# Altium PCB DST800_NMEA2k-CAN_Indicator.PcbDoc
Units mil, origin at the board's own origin, x right, y up, seen from the top; angles counter-clockwise.
Board outline 1775 x 2200 mil, 2 copper layers (Top Layer, Bottom Layer), stack 62.8 mil thick; 29 components, 28 nets, 162 pads, 35 vias.
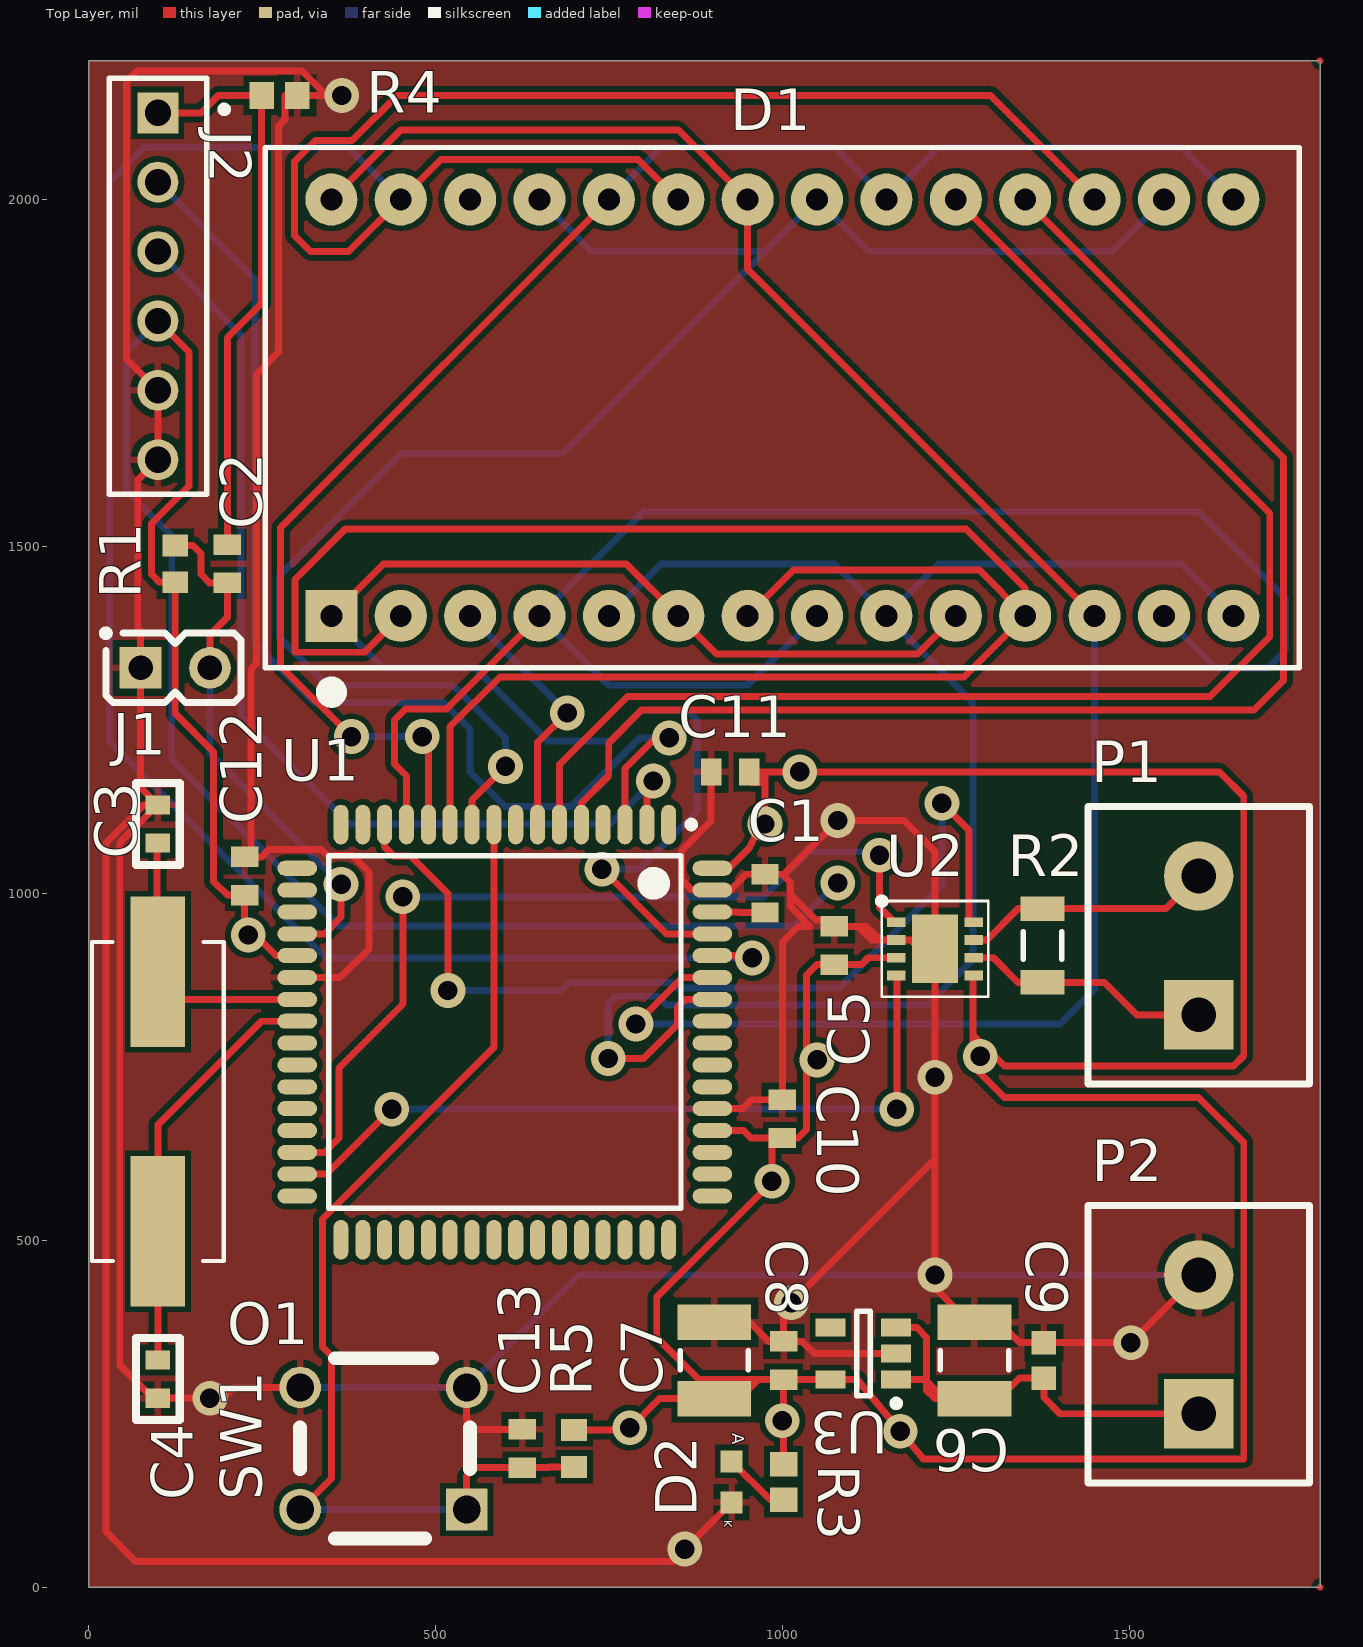
[diagram p0: Top Layer view]
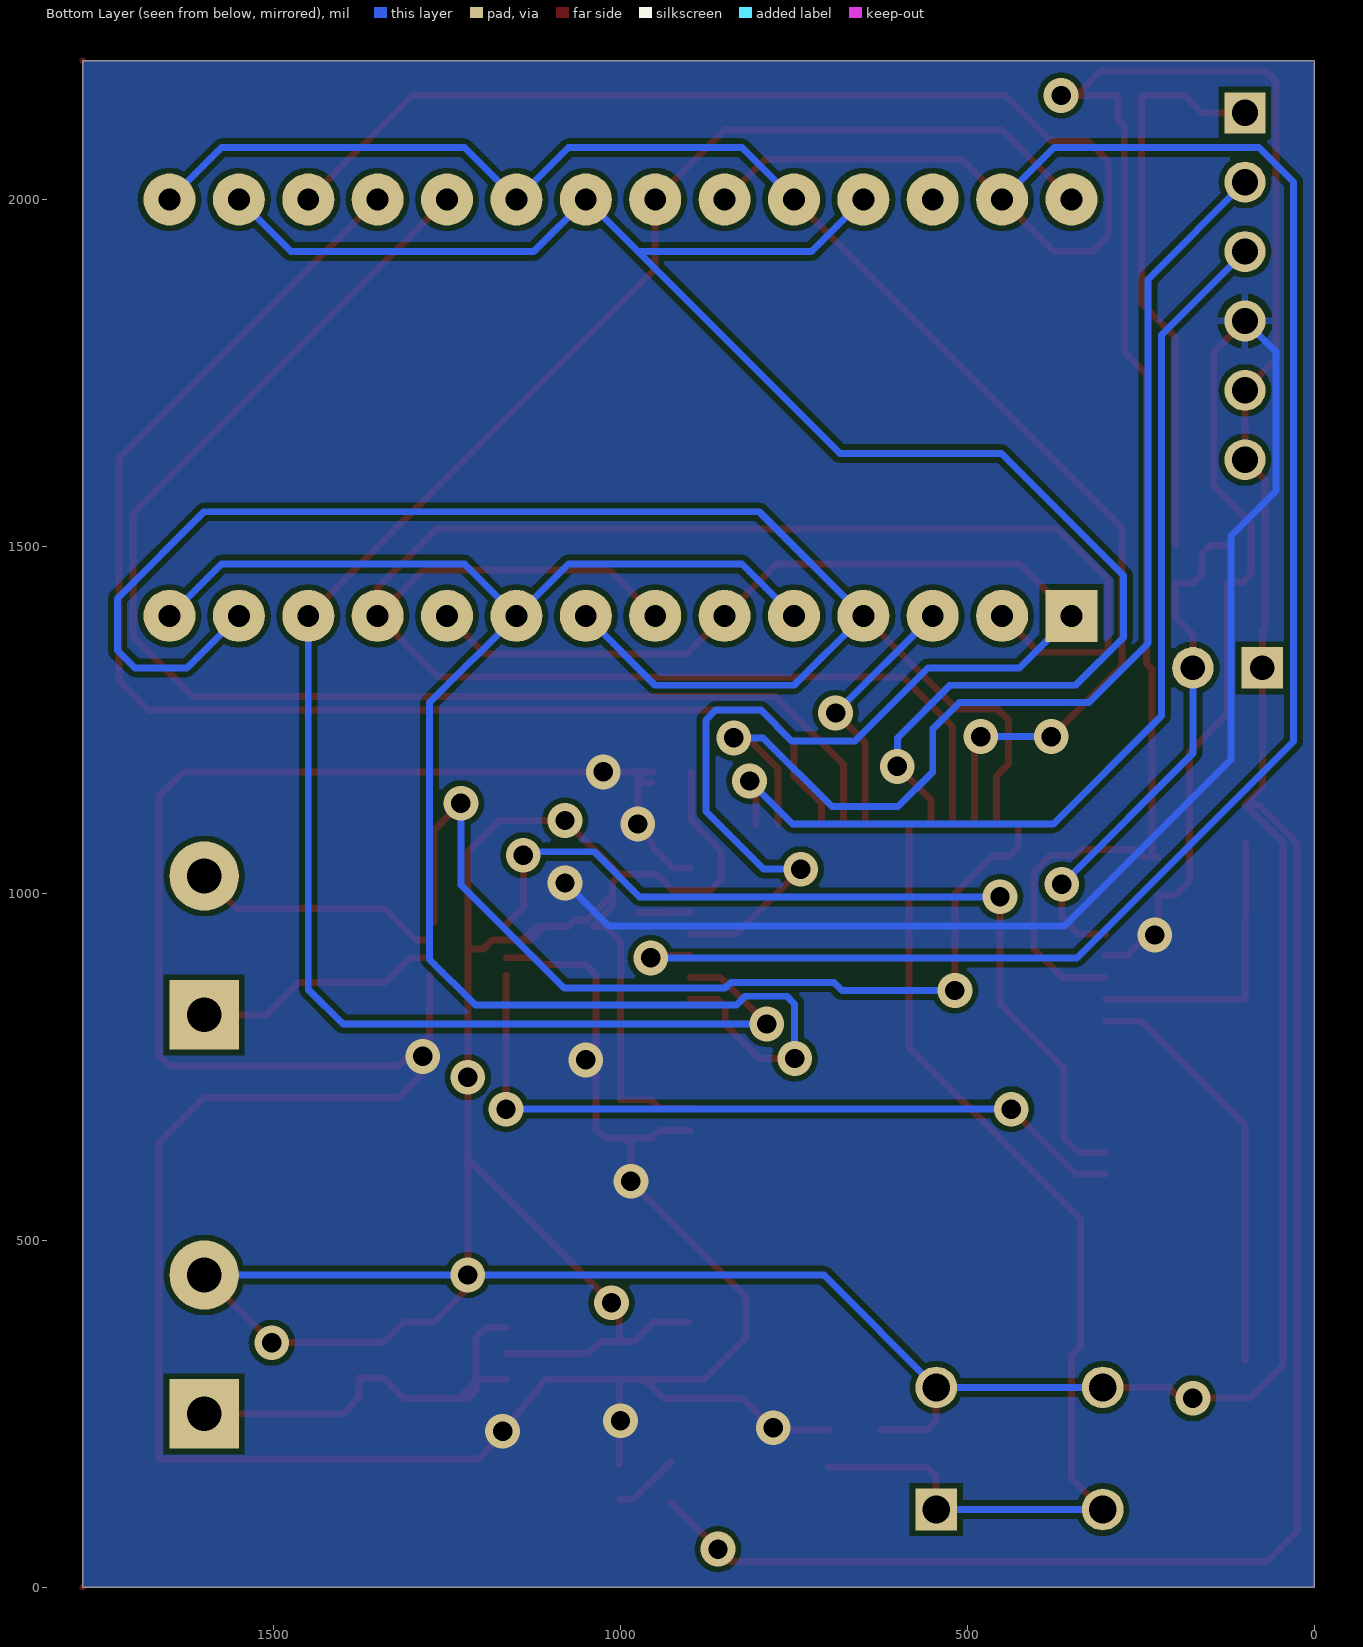
[diagram p1: Bottom Layer view, seen from below]

## Layer stack, top to bottom
Top Solder: solder mask 1, Solder Resist, Dk 3.5
Top Layer: signal copper 1.4
Dielectric 1: core 60, FR-4, Dk 4.6
Bottom Layer: signal copper 1.4
Bottom Solder: solder mask 1, Solder Resist, Dk 3.5

## Board outline
0,0 1775,0 1775,2200 0,2200

## Design rules (kind name [scope] priority, off if disabled: settings)
AssemblyTestPointUsage AssemblyTestPointUsage_1 [All] p2:
AssemblyTestpoint AssemblyTestpoint_1 [All] p2: testpointundercomponent=TRUE minsize=40 maxsize=100 preferedsize=60 minholesize=0 maxholesize=40 preferedholesize=32 testpointgrid=1 usegrid=TRUE gridtolerance=0.01 allowsidetop=TRUE allowsidebottom=TRUE
Clearance [All] p1: gap=8 ignorepadtopadclearanceinfootprint=FALSE
ComponentClearance ComponentClearance_1 [All] p2: gap=10 collisioncheckmode=3 verticalgap=10 showdistances=FALSE
DiffPairsRouting DiffPairsRouting_1 [All] p2: maxlimit=10 minlimit=10 mostfreqgap=10 toplayer_minwidth=15 toplayer_maxwidth=15 toplayer_prefwidth=15 bottomlayer_minwidth=15 bottomlayer_maxwidth=15 bottomlayer_prefwidth=15 maxuncoupledlength=500
FabricationTestPointUsage FabricationTestPointUsage_1 [All] p2: valid=0 allowmultiple=FALSE
FabricationTestpoint FabricationTestpoint_1 [All] p2: side=3 testpointundercomponent=TRUE minsize=40 maxsize=100 preferedsize=60 minholesize=0 maxholesize=40 preferedholesize=32 testpointgrid=1 allowsidetop=TRUE allowsidebottom=TRUE usegrid=TRUE gridtolerance=0.01
FanoutControl Fanout_LCC [IsLCC] p1: bgadir=Out bgaviamode=Centered fanoutstyle=Auto fanoutdirection=Alternating viagrid=1 // Fanout_LCC (Default Rule)
FanoutControl Fanout_BGA [IsBGA] p2: bgadir=Out bgaviamode=Centered fanoutstyle=Auto fanoutdirection=Alternating viagrid=1 // Fanout_BGA (Default Rule)
FanoutControl Fanout_Default [All] p4: bgadir=Out bgaviamode=Centered fanoutstyle=Auto fanoutdirection=Alternating viagrid=1 // Fanout_Default (Default Rule)
FanoutControl Fanout_Small [(CompPinCount < 5)] p5: bgadir=Out bgaviamode=Centered fanoutstyle=Auto fanoutdirection=OutThenIn viagrid=1 // Fanout_Small (Default Rule)
FanoutControl Fanout_BGA_1 [IsBGA] p6: bgadir=Out bgaviamode=Centered fanoutstyle=Auto fanoutdirection=Alternating viagrid=1 // Fanout_BGA (Default Rule)
FanoutControl Fanout_LCC_1 [IsLCC] p7: bgadir=Out bgaviamode=Centered fanoutstyle=Auto fanoutdirection=Alternating viagrid=1 // Fanout_LCC (Default Rule)
FanoutControl Fanout_SOIC_1 [IsSOIC] p8: bgadir=Out bgaviamode=Centered fanoutstyle=Auto fanoutdirection=Alternating viagrid=1 // Fanout_SOIC (Default Rule)
FanoutControl Fanout_Small_1 [(CompPinCount < 5)] p9: bgadir=Out bgaviamode=Centered fanoutstyle=Auto fanoutdirection=OutThenIn viagrid=1 // Fanout_Small (Default Rule)
FanoutControl Fanout_Default_1 [All] p10: bgadir=Out bgaviamode=Centered fanoutstyle=Auto fanoutdirection=Alternating viagrid=1 // Fanout_Default (Default Rule)
Height Height_1 [All] p2: minheight=0 maxheight=1000 prefheight=500
HoleSize HoleSize_1 [All] p2: absolutevalues=TRUE maxlimit=100 minlimit=1 maxpercent=80.000 minpercent=20.000
HoleToHoleClearance HoleToHoleClearance_1 [All] p2: gap=10 allowstackedmicrovias=TRUE
LayerPairs LayerPairs_1 [All] p2: enforce=TRUE
MinimumSolderMaskSliver [All] p1: minsoldermaskwidth=0
NetAntennae NetAntennae_1 [All] p2: netantennaetolerance=0
PasteMaskExpansion PasteMaskExpansion_1 [All] p2: expansion=0
PlaneClearance PlaneClearance_1 [All] p2: clearance=10
PlaneConnect [All] p1: pad.planeconnectstyle=Relief pad.reliefexpansion=20 pad.reliefentries=4 pad.reliefconductorwidth=10 pad.reliefairgap=10 via.planeconnectstyle=Direct via.reliefexpansion=20 via.reliefentries=4 via.reliefconductorwidth=10 via.reliefairgap=10
PlaneConnect PlaneConnect_1 [All] p2: planeconnectstyle=Direct reliefexpansion=20 reliefentries=4 reliefconductorwidth=10 reliefairgap=10
PolygonConnect [All] p1: thpad.connectstyle=Relief thpad.reliefconductorwidth=10 thpad.reliefentries=4 thpad.polygonreliefangle="90 Angle" thpad.airgapwidth=10 smdpad.connectstyle=Relief smdpad.reliefconductorwidth=10 smdpad.reliefentries=4 smdpad.polygonreliefangle="90 Angle" smdpad.airgapwidth=10 via.connectstyle=Direct via.reliefconductorwidth=10 via.reliefentries=4 via.polygonreliefangle="90 Angle" via.airgapwidth=10
PolygonConnect PolygonConnect_2 [All] p2: connectstyle=Relief reliefconductorwidth=10 reliefentries=4 polygonreliefangle="90 Angle" airgapwidth=10
PolygonConnect PolygonConnect_1 [IsVia] p3: connectstyle=Direct reliefconductorwidth=10 reliefentries=4 polygonreliefangle="90 Angle" airgapwidth=10
RoomDefinition DST800_NMEA2k-CAN_Indicator [InComponentClass('DST800_NMEA2k-CAN_Indicator')] p1: confinementstyle=ConfineIn formatcopy=TRUE lockcomponents=FALSE outline 0,0 1775,0 1775,2195 0,2195
RoutingCorners RoutingCorners_1 [All] p2: cornerstyle=45-Degree minsetback=100 maxsetback=100
RoutingLayers RoutingLayers_1 [All] p2: top layer_v5=TRUE bottom layer_v5=TRUE
RoutingPriority RoutingPriority_1 [All] p2: routingpriority=0
RoutingTopology RoutingTopology_1 [All] p2: topology=Shortest
RoutingVias [All] p1: holewidth=28 width=50 viastyle="Through Hole" minholewidth=28 minwidth=50 maxholewidth=28 maxwidth=50
RoutingVias RoutingVias_1 [All] p2: holewidth=28 width=50 viastyle="Through Hole" minholewidth=28 minwidth=50 maxholewidth=28 maxwidth=50
ShortCircuit ShortCircuit_1 [All] p2: allowed=FALSE
SilkToBoardRegionClearance SilkToBoardRegionClearance_1 [All] p2:
SilkToSilkClearance [All] p1: silktosilkclearance=0
SilkToSolderMaskClearance [IsPad] p1: minsilkscreentomaskgap=0 clearancetoexposedcopper=TRUE
SolderMaskExpansion [All] p1: expansion=4
SolderMaskExpansion SolderMaskExpansion_1 [All] p2: expansion=4
UnRoutedNet UnRoutedNet_1 [All] p2:
UnpouredPolygon UnpouredPolygon_1 [All] p2:
Width [All] p1: maxlimit=10 minlimit=10 preferedwidth=10
Width Width_1 [All] p2: maxlimit=100 minlimit=10 preferedwidth=10
22 further rules are at their usual default settings.

## Components (designator, comment, footprint, x,y, rotation, side; value= is the part's Value field where it differs from the comment)
C1 "CL10B104KB8NNNC" PCB-MHHQFTC5ILNRG4QI8DS6-1 975,1000 r270 top value=0.1µF
C2 "CL10B104KB8NNNC" PCB-MHHQFTC5ILNRG4QI8DS6-1 200,1475 r270 top value=0.1µF
C3 "C1608C0G1H150J080AA" PCB-69EC8BFNJHYEBNPBRRFX-1 100,1100 r270 top value=15.0pF
C4 "C1608C0G1H150J080AA" PCB-69EC8BFNJHYEBNPBRRFX-1 100,300 r90 top value=15.0pF
C5 "CL10B104KB8NNNC" PCB-MHHQFTC5ILNRG4QI8DS6-1 1075,925 r270 top value=0.1µF
C6 "C3225X7R1E106K250AC" PCB-J0JK5XR8QBNASKONCCG4-1 1276.84,326.84 r270 top value=10.0µF
C7 "C3225X7R1E106K250AC" PCB-J0JK5XR8QBNASKONCCG4-1 901.84,326.84 r270 top value=10.0µF
C8 "CL10B104KB8NNNC" PCB-MHHQFTC5ILNRG4QI8DS6-1 1001.84,326.84 r270 top value=0.1µF
C9 "06031C102MAT2A" CAPC1608X90X35LL15T15 1376.84,326.84 r270 top value=1000pF
C10 "CL10B104KB8NNNC" PCB-MHHQFTC5ILNRG4QI8DS6-1 1000,675 r270 top value=0.1µF
C11 "CL10B104KB8NNNC" PCB-MHHQFTC5ILNRG4QI8DS6-1 925,1175 r0 top value=0.1µF
C12 "CL10B104KB8NNNC" PCB-MHHQFTC5ILNRG4QI8DS6-1 225,1025 r270 top value=0.1µF
C13 "CL10B104KB8NNNC" PCB-MHHQFTC5ILNRG4QI8DS6-1 625,200 r270 top value=0.1µF
D1 "LDT-A514RI" LDTA514RI 1000,1700 r0 top
D2 "LTST-C190KGKT" PCB-EAPFWHP0RNKSGUJF96H3-1 926.84,151.84 r270 top
J1 "5-146281-2" PCB-ANGFY19QUC8NC8NC7D0M-1 75,1325 r0 top
J2 "961106-6404-AR" PCB-660833-1 100,1875 r270 top
O1 "9C-16.000MAAJ-T" PCB-3QVZOJCYIDN2GLTQQMBL-1 100,700 r90 top
P1 "282834-2" PCB-0KDX5SNEYUDSMU18L6ZV-1 1600,825 r90 top
P2 "282834-2" PCB-0KDX5SNEYUDSMU18L6ZV-1 1600,250 r90 top
R1 "CRG0603F10K" RESC1608X55X30NL15T15 125,1475 r270 top value=10kO
R2 "CRCW1206120RJNEA" RESC3216X60X45LL10T20 1375,925 r270 top value=120O
R3 "ERA-3YEB102V" RESC1608X55X30NL20T20 1001.84,151.84 r90 top value=1kO
R4 "DNP" RESC1608X55X30NL20T20 275,2150 r180 top value=1kO
R5 "CRG0603F10K" RESC1608X55X30NL15T15 700,200 r90 top value=10kO
SW1 "FSM102" PCB-8PS4WLA3PJ92CXV2YUVU-1 425,200 r180 top
U1 "AT90CAN32-16AU" 64A_L 600,800 r270 top
U2 "ATA6561-GBQW" PCBComponent_1 1220,920 r0 top
U3 "MIC5205-5.0YM5-TR" SOT-23-5_N 1116.84,336.84 r180 top

## Footprints (in the part's own frame and the unit in brackets; to place one, negate y for a bottom-side part, rotate by r counter-clockwise, add the part's x,y. Pads: shape width x height; smd on the part's side, far side on the other; paste and mask are expansions set on the pad)
64A_L [mm] "Thin QFP, 64-Leads, Body 14x14mm, Pitch 0.8mm, IPC High Density"
  oval 1.45x0.55 smd: 1(-7.6,6) 2(-7.6,5.2) 3(-7.6,4.4) 4(-7.6,3.6) 5(-7.6,2.8) 6(-7.6,2) 7(-7.6,1.2) 8(-7.6,0.4) 9(-7.6,-0.4) 10(-7.6,-1.2) 11(-7.6,-2) 12(-7.6,-2.8) 13(-7.6,-3.6) 14(-7.6,-4.4) 15(-7.6,-5.2) 16(-7.6,-6) 33(7.6,-6) 34(7.6,-5.2) 35(7.6,-4.4) 36(7.6,-3.6) 37(7.6,-2.8) 38(7.6,-2) 39(7.6,-1.2) 40(7.6,-0.4) 41(7.6,0.4) 42(7.6,1.2) 43(7.6,2) 44(7.6,2.8) 45(7.6,3.6) 46(7.6,4.4) 47(7.6,5.2) 48(7.6,6)
  oval 0.55x1.45 smd: 17(-6,-7.6) 18(-5.2,-7.6) 19(-4.4,-7.6) 20(-3.6,-7.6) 21(-2.8,-7.6) 22(-2,-7.6) 23(-1.2,-7.6) 24(-0.4,-7.6) 25(0.4,-7.6) 26(1.2,-7.6) 27(2,-7.6) 28(2.8,-7.6) 29(3.6,-7.6) 30(4.4,-7.6) 31(5.2,-7.6) 32(6,-7.6) 49(6,7.6) 50(5.2,7.6) 51(4.4,7.6) 52(3.6,7.6) 53(2.8,7.6) 54(2,7.6) 55(1.2,7.6) 56(0.4,7.6) 57(-0.4,7.6) 58(-1.2,7.6) 59(-2,7.6) 60(-2.8,7.6) 61(-3.6,7.6) 62(-4.4,7.6) 63(-5.2,7.6) 64(-6,7.6)
  silkscreen extent -7.72,-6.45 6.45,6.95, body extent -7,-7 7,7, height 1.6
CAPC1608X90X35LL15T15 [mm] "CAPC1608X90X35LL15T15"
  rect 0.85x0.9 smd: 1(-0.65,0) 2(0.65,0)
  body extent -0.88,-0.48 0.87,0.48, height 0.9
LDTA514RI [mm] "Lumex 2 digit 7 segment display"
  rect 1.905x1.905 hole 0.8: 1(-16.51,-7.62)
  round 1.905 hole 0.8: 2(-13.97,-7.62) 3(-11.43,-7.62) 4(-8.89,-7.62) 5(-6.35,-7.62) 6(-3.81,-7.62) 7(-1.27,-7.62) 8(1.27,-7.62) 9(3.81,-7.62) 10(6.35,-7.62) 11(8.89,-7.62) 12(11.43,-7.62) 13(13.97,-7.62) 14(16.51,-7.62) 15(16.51,7.62) 16(13.97,7.62) 17(11.43,7.62) 18(8.89,7.62) 19(6.35,7.62) 20(3.81,7.62) 21(1.27,7.62) 22(-1.27,7.62) 23(-3.81,7.62) 24(-6.35,7.62) 25(-8.89,7.62) 26(-11.43,7.62) 27(-13.97,7.62) 28(-16.51,7.62)
  silkscreen extent -18.92,-10.67 18.92,9.53, body extent -18.9,-9.5 18.9,9.5, height 12
PCB-0KDX5SNEYUDSMU18L6ZV-1 [mil]
  rect 100x100 hole 50: 1(0,0)
  round 100 hole 50: 2(200,0)
  silkscreen extent -100,-160 300,159, body extent -121,-159 301,160, height 394
PCB-3QVZOJCYIDN2GLTQQMBL-1 [mm]
  rect 5.5x2 smd: 1(-4.75,0) 2(4.75,0)
  silkscreen extent -5.84,-2.41 5.84,2.41, body extent -6.95,-2.5 6.95,2.5, height 4.5
PCB-8PS4WLA3PJ92CXV2YUVU-1 [mil]
  rect 60x60 hole 40: 1(-120,88)
  round 60 hole 40: 2(120,88) 3(-120,-88) 4(120,-88)
  silkscreen extent -125,-130 120,130, body extent -154,-118 154,118, height 235
PCB-69EC8BFNJHYEBNPBRRFX-1 [mm]
  rect 0.7x0.9 smd: 1(-0.7,0) 2(0.7,0)
  silkscreen extent -1.5,-0.8 1.5,0.8, body extent -0.8,-0.4 0.8,0.4, height 0.6
PCB-660833-1 [mm] "TE-5-534237-8"
  rect 1.5x1.5 hole 0.96: 1(-6.35,0)
  round 1.5 hole 0.96: 2(-3.81,0) 3(-1.27,0) 4(1.27,0) 5(3.81,0) 6(6.35,0)
  silkscreen extent -7.62,-1.78 7.62,2.56, body extent -6.98,-0.63 6.98,0.63, height 7.6
PCB-ANGFY19QUC8NC8NC7D0M-1 [mil]
  rect 60x60 hole 35.43: 1(0,0)
  round 60 hole 35.43: 2(100,0)
  silkscreen extent -55,-50 145,55, body extent -50,-50 150,50, height 374
PCB-EAPFWHP0RNKSGUJF96H3-1 [mm] "LTON_LTST-C190GKT"
  rect 0.8x0.8 smd: 1(-0.75,0) 2(0.75,0)
  body extent -0.8,-0.4 0.8,0.4, height 0.9
PCB-J0JK5XR8QBNASKONCCG4-1 [mm] "CAPC3225X279X50NL20T25"
  rect 1.3x2.7 smd: 1(-1.4,0) 2(1.4,0)
  silkscreen extent -0.35,-1.25 0.35,1.25, body extent -1.7,-1.35 1.7,1.35, height 2.79
PCB-MHHQFTC5ILNRG4QI8DS6-1 [mm] "CAPC1608X90X35NL15T15"
  rect 0.75x1 smd: 1(-0.7,0) 2(0.7,0)
  body extent -0.88,-0.48 0.87,0.48, height 0.9
PCBComponent_1 [mm]
  rect 0.675x0.35 smd: 1(-1.412,0.975) 2(-1.412,0.325) 3(-1.412,-0.325) 4(-1.412,-0.975) 5(1.412,-0.975) 6(1.412,-0.325) 7(1.412,0.325) 8(1.412,0.975)
  rect 1.7x2.5 smd paste-3: 9(0,0)
  silkscreen extent -2.07,-1.75 1.95,1.87, body extent -2.2,-1.8 2,2, height 1
RESC1608X55X30NL15T15 [mm] "RESC1608X55X30NL15T15"
  rect 0.8x0.95 smd: 1(-0.675,0) 2(0.675,0)
  body extent -0.87,-0.48 0.87,0.48, height 0.55
RESC1608X55X30NL20T20 [mm] "RESC1608X55X30NL20T20"
  rect 0.9x1 smd: 1(-0.65,0) 2(0.65,0)
  body extent -0.9,-0.5 0.9,0.5, height 0.55
RESC3216X60X45LL10T20 [mm] "RESC3216X60X45LL10T20"
  rect 0.9x1.6 smd: 1(-1.35,0) 2(1.35,0)
  silkscreen extent -0.5,-0.7 0.5,0.7, body extent -1.65,-0.85 1.65,0.85, height 0.6
SOT-23-5_N [mm]
  rect 1.1x0.65 smd: 1(-1.2,0.95) 2(-1.2,0) 3(-1.2,-0.95) 4(1.2,-0.95) 5(1.2,0.95)
  silkscreen extent -1.33,-1.55 0.25,1.95, body extent -1.4,-1.45 1.4,1.45, height 1.45

## Part data
C1 C2 C5 C8 C10 C11 C12 C13: library part CMP-1af8d38ac64bc53f-5, "CAP CER 0.1uF 50V X7R 0603", Manufacturer="Samsung Electro-Mechanics", Supplier Part Number 1=1276-1000-1-ND, ManufacturerPartNumber=CL10B104KB8NNNC, Mounting Type=SMT, OctopartID=1af8d38ac64bc53f, Octopart URL=https://octopart.com/cl10b104kb8nnnc-samsung-7928277, Supplier 1=Digi-Key, Type=X7R
C3 C4: library part CMP-57259fa49f8088e2-2, "CAP CER 15pF ±5% 50V C0G/NP0 0603 [1608]", Manufacturer=TDK, Supplier Part Number 1=445-1271-1-ND, ManufacturerPartNumber=C1608C0G1H150J080AA, Mounting Type=SMT, OctopartID=57259fa49f8088e2, Octopart URL=https://octopart.com/c1608c0g1h150j080aa-tdk-25947587, Supplier 1=Digi-Key, Type=C0G/NP0
C6 C7: library part CMP-2bdce35de069f41b-1, "CAP CER 10uF ±10% 25V X7R 1210", Case/Package=1210, Manufacturer=TDK, Supplier Part Number 1=445-3942-1-ND, ManufacturerPartNumber=C3225X7R1E106K250AC, Mounting Type=SMT, OctopartID=2bdce35de069f41b, Octopart URL=http://octopart.com/c3225x7r1e106k250ac-tdk-25947859, Supplier 1=Digi-Key, Type=X7R
C9: library part CMP-126202-2, "CAP CER 1000pF ±20% 100V X7R 0603", Case/Package=0603, Manufacturer=AVX, Supplier Part Number 1=478-3699-1-ND, Tolerance=±20%, ManufacturerPartNumber=06031C102MAT2A, Mounting Type=SMT, OctopartID=2b04e20cf2f8f4c3, Octopart URL=https://octopart.com/06031c102mat2a-avx+interconnect+%2F+elco-195738, Supplier 1=Digi-Key, Type=X7R
D1: library part CMP-6dbba4b18441b27c-1, "Display 3-digit 7-Seg 0.56 in", Case/Package=DIP, Manufacturer=Lumex, Supplier Part Number 1=67-1423-ND, ManufacturerPartNumber=LDT-A514RI, Mounting Type=TH, OctopartID=6dbba4b18441b27c, Octopart URL=http://octopart.com/ldt-a514ri-lumex-52380, Supplier 1=Digi-Key
D2: library part CMP-e1642866a00b3ea3-3, "LED 0603 green", Case/Package=0603, Manufacturer=Lite-On, Supplier Part Number 1=160-1435-1-ND, ManufacturerPartNumber=LTST-C190KGKT, Mounting Type=SMT, OctopartID=e1642866a00b3ea3, Octopart URL=http://octopart.com/ltst-c190kgkt-lite-on-549897, Supplier 1=Digi-Key
J1: library part CMP-39c9f206a0b6e60e-14, "CONN HEADER VERT 2POS Single 0.1in pitch", Manufacturer="TE Connectivity", Supplier Part Number 1=A121481-ND, ManufacturerPartNumber=5-146281-2, Mounting Type=TH, OctopartID=39c9f206a0b6e60e, Supplier 1=Digi-Key
J2: library part CMP-660833-2, "CONN HEADER VERT 6POS Single 0.1in pitch", Manufacturer=3M, Supplier Part Number 1=3M9457-06-ND, ManufacturerPartNumber=961106-6404-AR, Mounting Type=TH, OctopartID=f2bb3b6a6b3d2d7c, Octopart URL=https://octopart.com/961106-6404-ar-3m-14400736, Supplier 1=Digi-Key
O1: library part CMP-df271731c43900e0-3, "Crystal 16MHz 30ppm  18pF  HC-49/S SMD", Manufacturer="TXC CORPORATION", Supplier Part Number 1=887-1059-1-ND, ManufacturerPartNumber=9C-16.000MAAJ-T, Mounting Type=SMT, OctopartID=df271731c43900e0, Octopart URL=http://octopart.com/9c-16.000maaj-t-txc-18628216, Supplier 1=Digi-Key
P1 P2: library part CMP-369bfdc835bbe95c-32, "CONN Terminal Block; 16-30 AWG 0.197 in", Manufacturer="TE Connectivity", Supplier Part Number 1=A98333-ND, ManufacturerPartNumber=282834-2, Mounting Type=TH, Octopart URL=https://octopart.com/282836-2-te+connectivity-39396934, Supplier 1=Digi-Key
R1 R5: library part CMP-584891b72cc4878f-2, "RES 10K 1% 0.1W 0603", Case/Package=0603, Manufacturer="TE Connectivity", Power Rating="0.1 W", Supplier Part Number 1=A106048CT-ND, ManufacturerPartNumber=CRG0603F10K, Mounting Type=SMT, OctopartID=584891b72cc4878f, Octopart URL=http://octopart.com/crg0603f10k-te+connectivity-16077290, Supplier 1=Digi-Key
R2: library part CMP-1858100-4, "RES Thick Film 120ohm 5% 1/4W 1206", Case/Package=1206[3216], Manufacturer=Vishay, Power Rating="0.25 W", Supplier Part Number 1=541-120ECT-ND, Tolerance=±5%, ManufacturerPartNumber=CRCW1206120RJNEA, Mounting Type=SMT, OctopartID=57d69c85b6bb8811, Octopart URL=https://octopart.com/crcw1206120rjnea-vishay+dale-39437323, Supplier 1=Digi-Key, Type=Thick
R3: library part CMP-3717598-2, "RES Metal Film 1Kohm 0.1%  0603", Manufacturer=Panasonic, Power Rating="0.063 W", Supplier Part Number 1=P1.0KYCT-ND, Tolerance=±0.1%, ManufacturerPartNumber=ERA-3YEB102V, Mounting Type=SMT, OctopartID=4ba281e6ea859465, Octopart URL=https://octopart.com/era-3yeb102v-panasonic-55477313, Supplier 1=Digi-Key, Type=Metal
R4: library part CMP-3717598-2, "RES Metal Film 1Kohm 0.1%  0603", Manufacturer=Panasonic, ManufacturerPartNumber=ERA-3YEB102V, Power Rating="0.063 W", Supplier Part Number 1=P1.0KYCT-ND, Tolerance=±0.1%, Mounting Type=SMT, OctopartID=4ba281e6ea859465, Octopart URL=https://octopart.com/era-3yeb102v-panasonic-55477313, Supplier 1=Digi-Key, Type=Metal
SW1: library part CMP-43e488b0e8c29c23-11, "PUSHBUTTON Momentary Tactile SPST Thru-Hole", Manufacturer="TE Connectivity", Supplier Part Number 1=450-1128-ND, ManufacturerPartNumber=FSM102, Mounting Type=TH, OctopartID=43e488b0e8c29c23, Supplier 1=Digi-Key
U1: library part CMP-972593-3, "IC Microcontroller 8-bit AVR 32KB Flash CAN Controller 53GPIO 64-pin LQFP", Case/Package=TQFP, Manufacturer=Microchip, Supplier Part Number 1=AT90CAN32-16AU-ND, ManufacturerPartNumber=AT90CAN32-16AU, Mounting Type=SMT, OctopartID=ffbd34d61e6e207a, Octopart URL=https://octopart.com/at90can32-16au-atmel-39961781, Supplier 1=Digi-Key
U2: library part CMP-9a565056add04591-7, "IC Transeiver CAN 5Mbps 8-Pin VDFN EP", Manufacturer=Microchip, Supplier Part Number 1=ATA6561-GBQWCT-ND, ManufacturerPartNumber=ATA6561-GBQW, Mounting Type=SMT, OctopartID=9a565056add04591, Octopart URL=http://octopart.com/ata6561-gbqw-atmel-50991840, Supplier 1=Digi-Key
U3: library part CMP-6255a8a416e5bd92-5, "IC Regulator LDO 5 V Fixed Output 150 mA SOT-23-5", Manufacturer=Microchip, Supplier Part Number 1=576-1261-1-ND, ManufacturerPartNumber=MIC5205-5.0YM5-TR, Mounting Type=SMT, Octopart URL=https://octopart.com/mic5205-5.0ym5-tr-microchip-66802134, Supplier 1=Digi-Key

## Via types
v1: diameter 50, hole 28, Top Layer to Bottom Layer, 35 vias

## Nets (pads, with @x,y where several pads share a name; then routed paths per layer and width w, separated by ;. In a path a pad name is that pad's centre, name@x,y a point inside that pad or via, vN(x,y) a via of type N, cw(c..) or ccw(c..) an arc to the next point about the centre after c; other vN are vias at no path point)
ANODE1: D1.18 U1.5 | length 1991.6
  Top Layer w10: U1.5 710.24,1130 749.77,1169.54 749.77,1216.77 797,1264 1680,1264 1722.5,1306.5 1722.5,1627.5 D1.18
ANODE2: D1.19 U1.6 | length 2004
  Top Layer w10: U1.6 678.74,1185.74 777,1284 1616.5,1284 1702.5,1370 1702.5,1547.5 D1.19
ANODE3: D1.3 U1.7 | length 376.5
  Top Layer w10: U1.7 647.24,1217.24 v1(690,1260)
  Bottom Layer w10: D1.3 v1(690,1260)
BUTTON: C13.2 R5.1 SW1.1 SW1.2 U1.9 | length 1562.2
  Top Layer w10: SW1.2 350,157 350,333 337,346 337,531 584.25,778.25 U1.9 ; SW1.1 545,160 557.44,172.44 C13.2 662,172.44 662.98,173.42 R5.1
  Bottom Layer w10: SW1.2 SW1.1
CANH: P1.2 R2.1 U2.7 | length 362.6
  Top Layer w10: U2.7 1294.65,932.8 1340,978.15 R2.1 1553.15,978.15 P1.2
CANL: P1.1 R2.2 U2.6 | length 358.4
  Top Layer w10: U2.6 1304,907.2 1339.35,871.85 R2.2 1464,871.85 1510.85,825 P1.1
CANSTBY: U1.14 U2.8 | length 1385.2
  Top Layer w10: U1.14 426.77,1067.23 440,1054 464,1054 518,1000 v1(518,860) ; v1(1230,1130) 1269,1091 1269,958.39 U2.8
  Bottom Layer w10: v1(518,860) 680.8,860 692.54,871.74 840.75,871.74 849,863.49 1081.49,863.49 1230,1012 v1(1230,1130)
DTR: C2.1 J2.1 R4.2 | length 827.7
  Top Layer w10: J2.1 162,2125 187,2150 R4.2 249.41,1850.41 200,1801 C2.1
GND: C1.1 C3.1 C4.1 C5.1 C6.1 C7.1 C8.1 C9.1 C10.1 C11.1 C12.1 C13.1 D2.2 J1.1 J2.5 J2.6 P2.2 R4.1 SW1.3 SW1.4 U1.22 U1.53 U1.63 U2.2 U2.9 U3.2 | length 10731.9
  Top Layer w10: C12.1 C12.1@234,1052.56 ; U1.22 362.74,878.74 404,920 404,1031 380,1055 344,1055 336,1063 259.44,1063 249,1052.56 C12.1@234,1052.56 ; SW1.4 209.56,288 194,272.44 C4.1 92.56,272.44 45,320 45,1073.44 C3.1@99.12,1127.56 ; SW1.3 545,240 557.44,227.56 C13.1 ; C11.1 897.44,1104.44 855,1062 855,1019.72 870,1004.72 U1.63 925,1004.72 947.84,1027.56 C1.1 1000,1027.56 ; U1.53 943,689.76 955.8,702.56 C10.1 1000,930 1022.56,952.56 1040,952.56 1011.57,980.99 1011.57,998.43 ; C7.1 952.82,381.95 980.37,354.4 C8.1 ; D2.2 841.53,37 68,37 25,80 25,1072.56 80,1127.56 C3.1@99.12,1127.56 ; U3.2 1046.16,336.84 1028.6,354.4 C8.1 ; P2.2 v1(1502.43,352.43) C9.1 1341.53,352.43 1312,381.95 C6.1 1269,381.95 1220,430.95 1220,617 ; C3.1@99.12,1127.56 C3.1 75,1152.56 J1.1 75,1378 71,1382 71,1596 J2.6 J2.5 55,1770 55,2170 70,2185 308,2185 343,2150 R4.1 283,2150 283,2115 274,2106 274,1780 242,1748 242,1331 234,1323 C12.1@234,1052.56 ; 1000,1027.56 1002.56,1027.56 v1(1080,1105) 1175,1105 1220,1060 U2.9 ; 1000,1027.56 1011.57,1015.99 1011.57,998.43 ; C8.1 1001.84,398.84 1220,617 ; 1011.57,998.43 1048.39,961.61 1065.95,961.61 C5.1 1109,952.56 ; 1109,952.56 1121.36,952.56 1141.12,932.8 ; 1109,952.56 1128.76,932.8 1141.12,932.8 ; 1141.12,932.8 U2.2 1185,932.8 1197.8,920 U2.9 ; 1220,617 U2.9
  Bottom Layer w10: SW1.4 SW1.3 707,450 P2.2
  other v1: 859.53,55 175,272.44 1013,410 1220,450 1220,735 365,2150
NetC1_2: C1.2 U1.62 | length 76.1
  Top Layer w10: U1.62 936,973.23 936.79,972.44 C1.2
NetC2_2: C2.2 J1.2 R1.1 U1.20 | length 758.5
  Top Layer w10: R1.1 150.43,1501.57 162,1490 162,1460 174.56,1447.44 C2.2 200,1398 175,1373 J1.2 ; U1.20 340,941.73 364,965.73 v1(364,1013)
  Bottom Layer w10: J1.2 175,1202 v1(364,1013)
NetC3_2: C3.2 O1.2 U1.23 | length 427.4
  Top Layer w10: C3.2 99,1072.44 99,968 100,967 O1.2 100,847.24 U1.23
NetC4_2: C4.2 O1.1 U1.24 | length 601.6
  Top Layer w10: C4.2 100,420 O1.1 100,666.52 249.23,815.75 U1.24
NetD2_1: D2.1 R3.1 | length 97.8
  Top Layer w10: D2.1 981.95,126.25 R3.1
RXCAN: U1.31 U2.4 | length 1096.2
  Top Layer w10: U1.31 343.28,595.28 v1(437,689) ; U2.4 1165,881.61 v1(1165,689)
  Bottom Layer w10: v1(437,689) v1(1165,689)
RXI: J2.3 U1.2 | length 1469.6
  Top Layer w10: U1.2 804.72,1152.72 v1(814,1162)
  Bottom Layer w10: J2.3 220,1805 220,1256 376,1100 752,1100 v1(814,1162)
SEGA: D1.16 D1.21 D1.25 U1.10 | length 2537.5
  Top Layer w10: U1.10 552.76,1134.76 v1(601,1183)
  Bottom Layer w10: v1(601,1183) 601,1224 525,1300 344,1300 275,1369 275,1458 450.71,1633.71 683.71,1633.71 D1.21 1125,1925 1475,1925 D1.16 ; D1.25 725,1925 975,1925
SEGB: D1.15 D1.20 D1.24 U1.12 | length 2268.9
  Top Layer w10: v1(379,1226) 277,1328 277,1527 D1.24 ; v1(481,1226) 489.76,1217.24 U1.12
  Bottom Layer w10: v1(379,1226) v1(481,1226) ; D1.24 825,2075 1075,2075 D1.20 1225,2075 1575,2075 D1.15
SEGC: D1.4 D1.8 D1.13 U1.13 | length 2392.2
  Top Layer w10: U1.13 458.27,1169.12 441,1186.39 441,1250 457,1266 516,1266 D1.4
  Bottom Layer w10: D1.8 950,1300 750,1300 D1.4 800,1550 1600,1550 1725,1425 1725,1350 1700,1325 1625,1325 D1.13
SEGD: D1.2 D1.7 D1.11 U1.11 | length 2927.6
  Top Layer w10: D1.2 397.5,1347.5 297.5,1347.5 297.5,1452.5 370,1525 1265,1525 1350,1440 D1.11 ; U1.11 521.26,1240.26 593,1312 1262,1312 D1.11 ; D1.7 1016,1466 1284,1466 D1.11
SEGDP: D1.5 D1.9 D1.14 U1.58 | length 2413.3
  Top Layer w10: v1(749,762) 800,762 849,811 849,836.24 860,847.24 U1.58
  Bottom Layer w10: v1(749,762) 749,840.74 760,851.74 820.26,851.74 833,839 1209,839 1275,905 1275,1275 D1.9 ; D1.5 825,1475 1075,1475 D1.9 ; D1.14 1575,1475 1225,1475 D1.9
SEGE: D1.1 D1.6 D1.10 U1.61 | length 2134.8
  Top Layer w10: D1.1 425,1475 775,1475 D1.6 905,1345 1195,1345 D1.10 ; v1(740,1035) 833.27,941.73 U1.61
  Bottom Layer w10: D1.1 425,1325 556.86,1325 662.26,1219.6 753.23,1219.6 797.63,1264 863,1264 877,1250 877,1118 794,1035 v1(740,1035)
SEGF: D1.17 D1.23 D1.27 U1.60 | length 4395.2
  Top Layer w10: D1.23 792,2058 508,2058 D1.27 375,1925 320,1925 297,1948 297,2055 327,2085 380,2085 445,2150 1300,2150 D1.17 ; U1.60 953.29,910.24 v1(956.53,907)
  Bottom Layer w10: D1.27 375,2075 80,2075 30,2025 30,1219.15 342.15,907 v1(956.53,907)
SEGG: D1.12 D1.22 D1.28 U1.59 | length 2847.9
  Top Layer w10: D1.28 450,2100 850,2100 D1.22 950,1900 D1.12 ; v1(789,811.74) 856,878.74 U1.59
  Bottom Layer w10: v1(789,811.74) 1400,811.74 1450,861.74 D1.12
TXCAN: U1.30 U2.1 | length 1310.9
  Top Layer w10: U1.30 340,626.77 360.81,647.58 360.81,748.14 453,840.33 v1(453,995) ; v1(1140,1055) 1140,980 U2.1@1163.01,956.99
  Bottom Layer w10: v1(453,995) 972.57,995 1037.57,1060 1156.56,1060 1151.56,1055 v1(1140,1055)
TXO: J2.2 U1.3 | length 1657.2
  Top Layer w10: U1.3 773.23,1180 817.23,1224 v1(837,1224)
  Bottom Layer w10: J2.2 240,1885 240,1360 325,1275 511.65,1275 550,1236.64 550,1175 600,1125 695.47,1125 794.47,1224 v1(837,1224)
VCC: C5.2 C7.2 C8.2 C10.2 C11.2 C12.2 J2.4 R1.2 R3.2 R5.2 U1.21 U1.52 U1.64 U2.3 U2.5 U3.5 | length 7823.1
  Top Layer w10: J2.4 145,1780 145,1587 91,1533 91,1460 102.58,1448.42 R1.2 125,1259 180,1204 180,1017.44 200,997.44 C12.2 225,955.24 270,910.24 U1.21 ; R5.2 778,226.57 823.14,271.72 C7.2 938,271.72 965.56,299.28 ; U1.52 944,658.27 954.83,647.44 C10.2 ; U1.64 923,1036.22 952.56,1065.78 975,1113.05 975,1165 ; C11.2 C11.2@965,1175 ; C11.2@955,1160 970,1160 975,1165 ; R3.2 C8.2 ; v1(1080,1015) v1@1080,1016 ; U2.3 1123.76,907.2 1114,897.44 C5.2 1050,897.44 1035,882.44 1035,660 1022.44,647.44 C10.2 ; U2.5 1275,881.61 1275,796 ; C11.2@965,1175 975,1175 ; C11.2@965,1175 975,1165 ; 965.56,299.28 879.72,299.28 819,360 819,418 985,584 985,641.26 C10.2 ; 965.56,299.28 C8.2 ; 975,1165 975,1175 ; 975,1175 1630,1175 1665,1140 1665,766 1650,751 1320,751 1275,796 ; C8.2 1035,299.28 1035.16,299.43 U3.5 1108,299.43 1203,185 1665,185 1665,641 1600,706 1320,706 1275,751 1275,796
  Bottom Layer w10: J2.4 55,1780 55,1580 120,1515 120,1193 360,953 1017,953 1079,1015 v1(1080,1015)
  other v1: 1170,225 780,230 1000,240 985,585 1050,760 1285,765 230,940 975,1100 1025,1175
VIN: C6.2 C9.2 P2.1 U3.1 U3.3 | length 654.1
  Top Layer w10: U3.1 1206,299.43 1208,297.43 ; U3.3 1193.76,374.24 1208,360 1208,297.43 ; P2.1 1400,250 1376.84,273.16 C9.2 1341.53,301.25 1312,271.72 C6.2 C6.2@1233.72,271.72 ; 1208,297.43 C6.2@1233.72,271.72 ; 1208,297.43 1208,283.72 1220,271.72 C6.2@1233.72,271.72
pads on no net: D1.26 U1.1 U1.4 U1.8 U1.15 U1.16 U1.17 U1.18 U1.19 U1.25 U1.26 U1.27 U1.28 U1.29 U1.32 U1.33 U1.34 U1.35 U1.36 U1.37 U1.38 U1.39 U1.40 U1.41 U1.42 U1.43 U1.44 U1.45 U1.46 U1.47 U1.48 U1.49 U1.50 U1.51 U1.54 U1.55 U1.56 U1.57 U3.4
copper on no net: | length 0

## Polygon pours and split planes (outlines as drawn)
GND on Top Layer "Top Layer-No Net" (solid, remove dead copper, pour order 2): 0,0 0,2200 1775,2200 1775,0
VCC on Bottom Layer "VCC_L02_P004" (solid, remove dead copper, pour order 4): 0,0 0,2200 1775,2200 1775,0

## Dimensions
0,0 to 0,2200 on Drill Drawing
0,0 to 1775,0 on Drill Drawing

## Text inside footprints (layer, text, board x,y; h text height)
D2: Top Overlay "K" at 931.84,96.84 h20 r90; Top Overlay "A" at 921.84,221.84 h30 r270